# Altium PCB PCB1.PcbDoc
Units mil, origin at the board's own origin, x right, y up, seen from the top; angles counter-clockwise.
Board outline 4250 x 4500 mil, 2 copper layers (Top Layer, Bottom Layer); 39 components, 38 nets, 160 pads, 0 vias.
Unrouted connection lines stored in the file: 41.
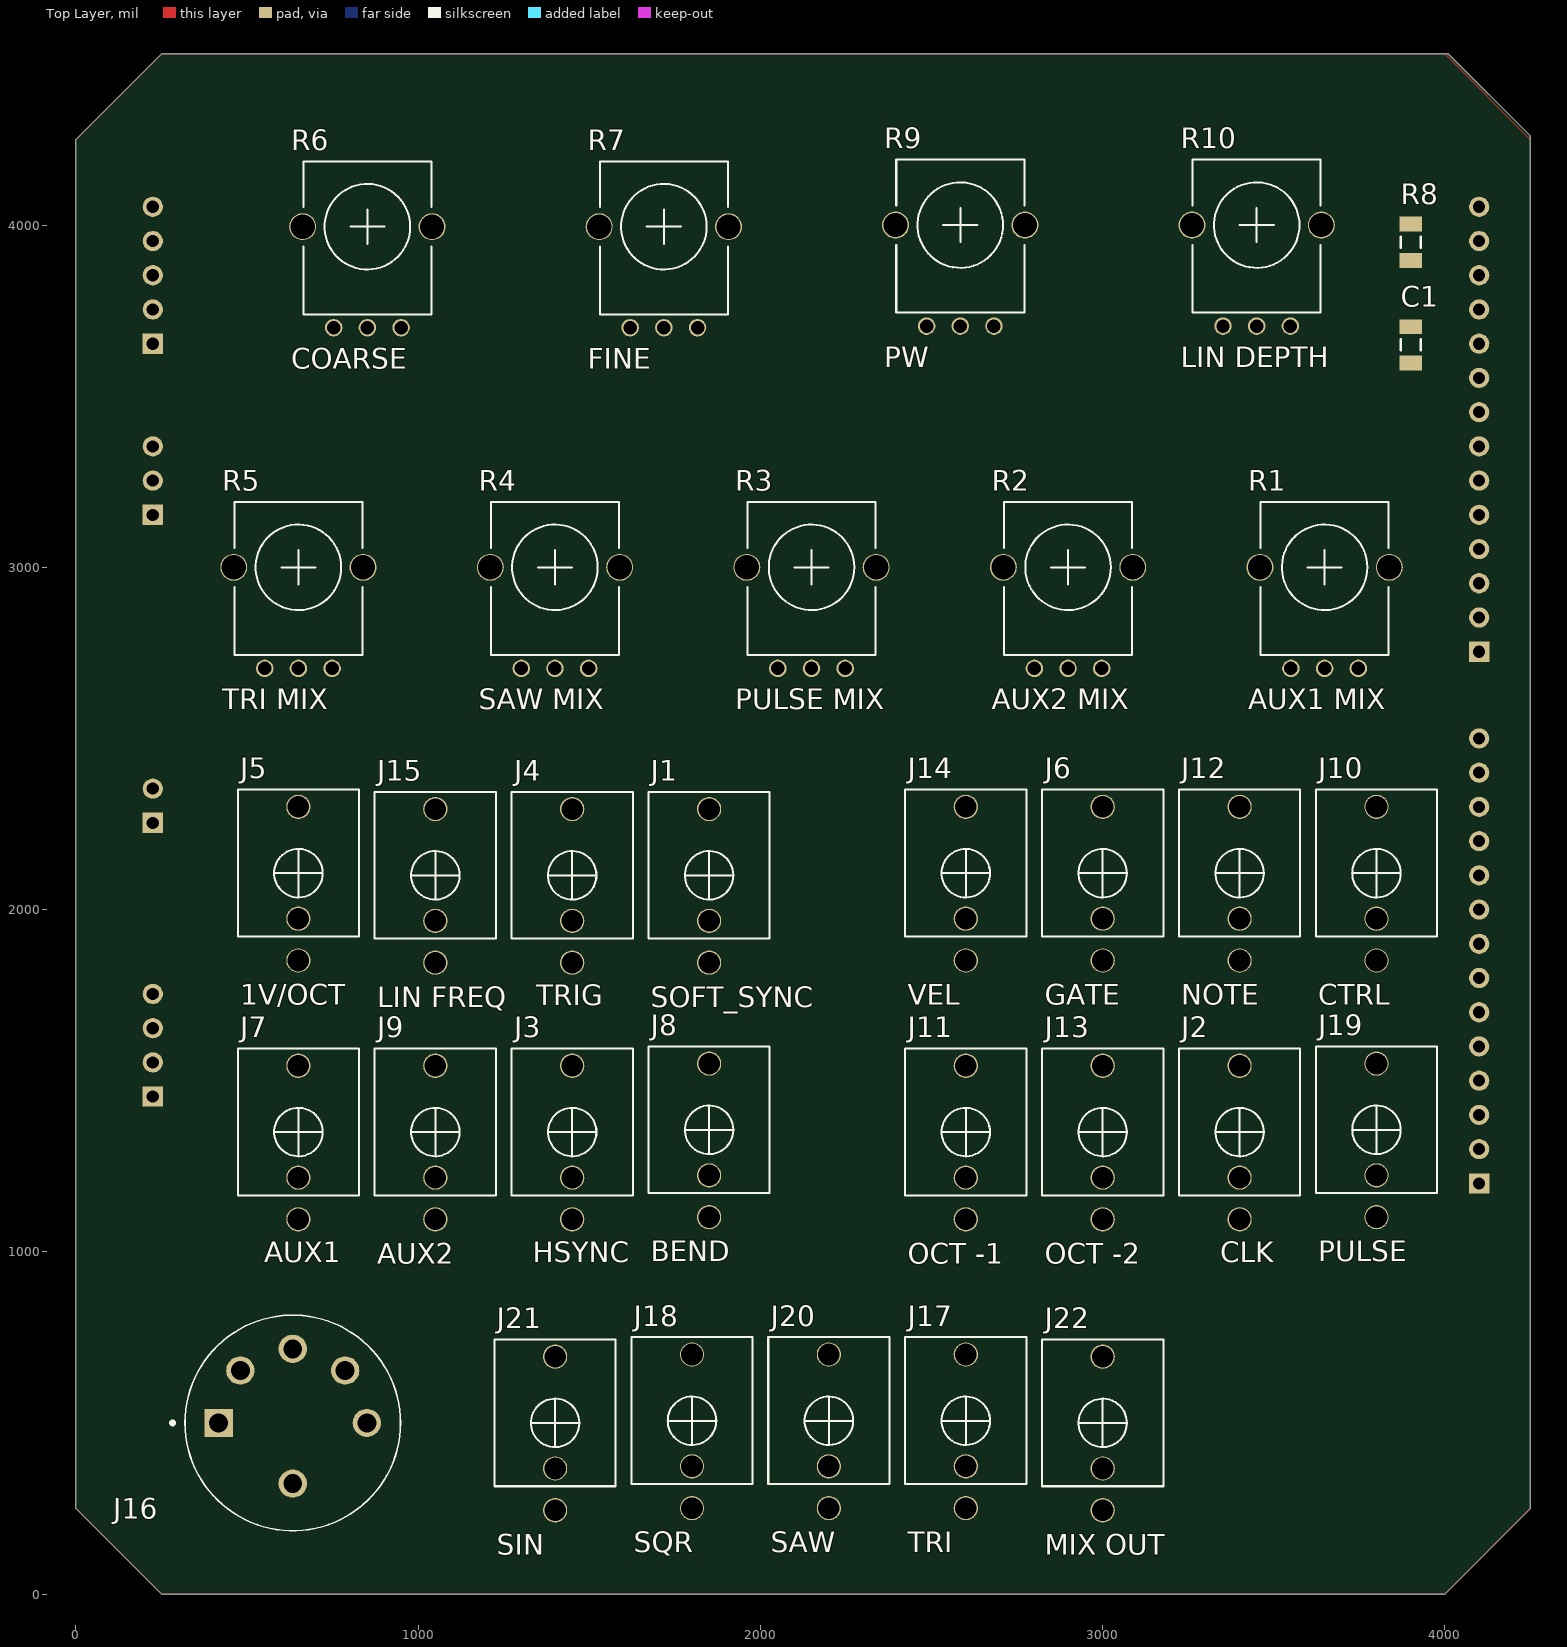
[diagram p0: Top Layer view]
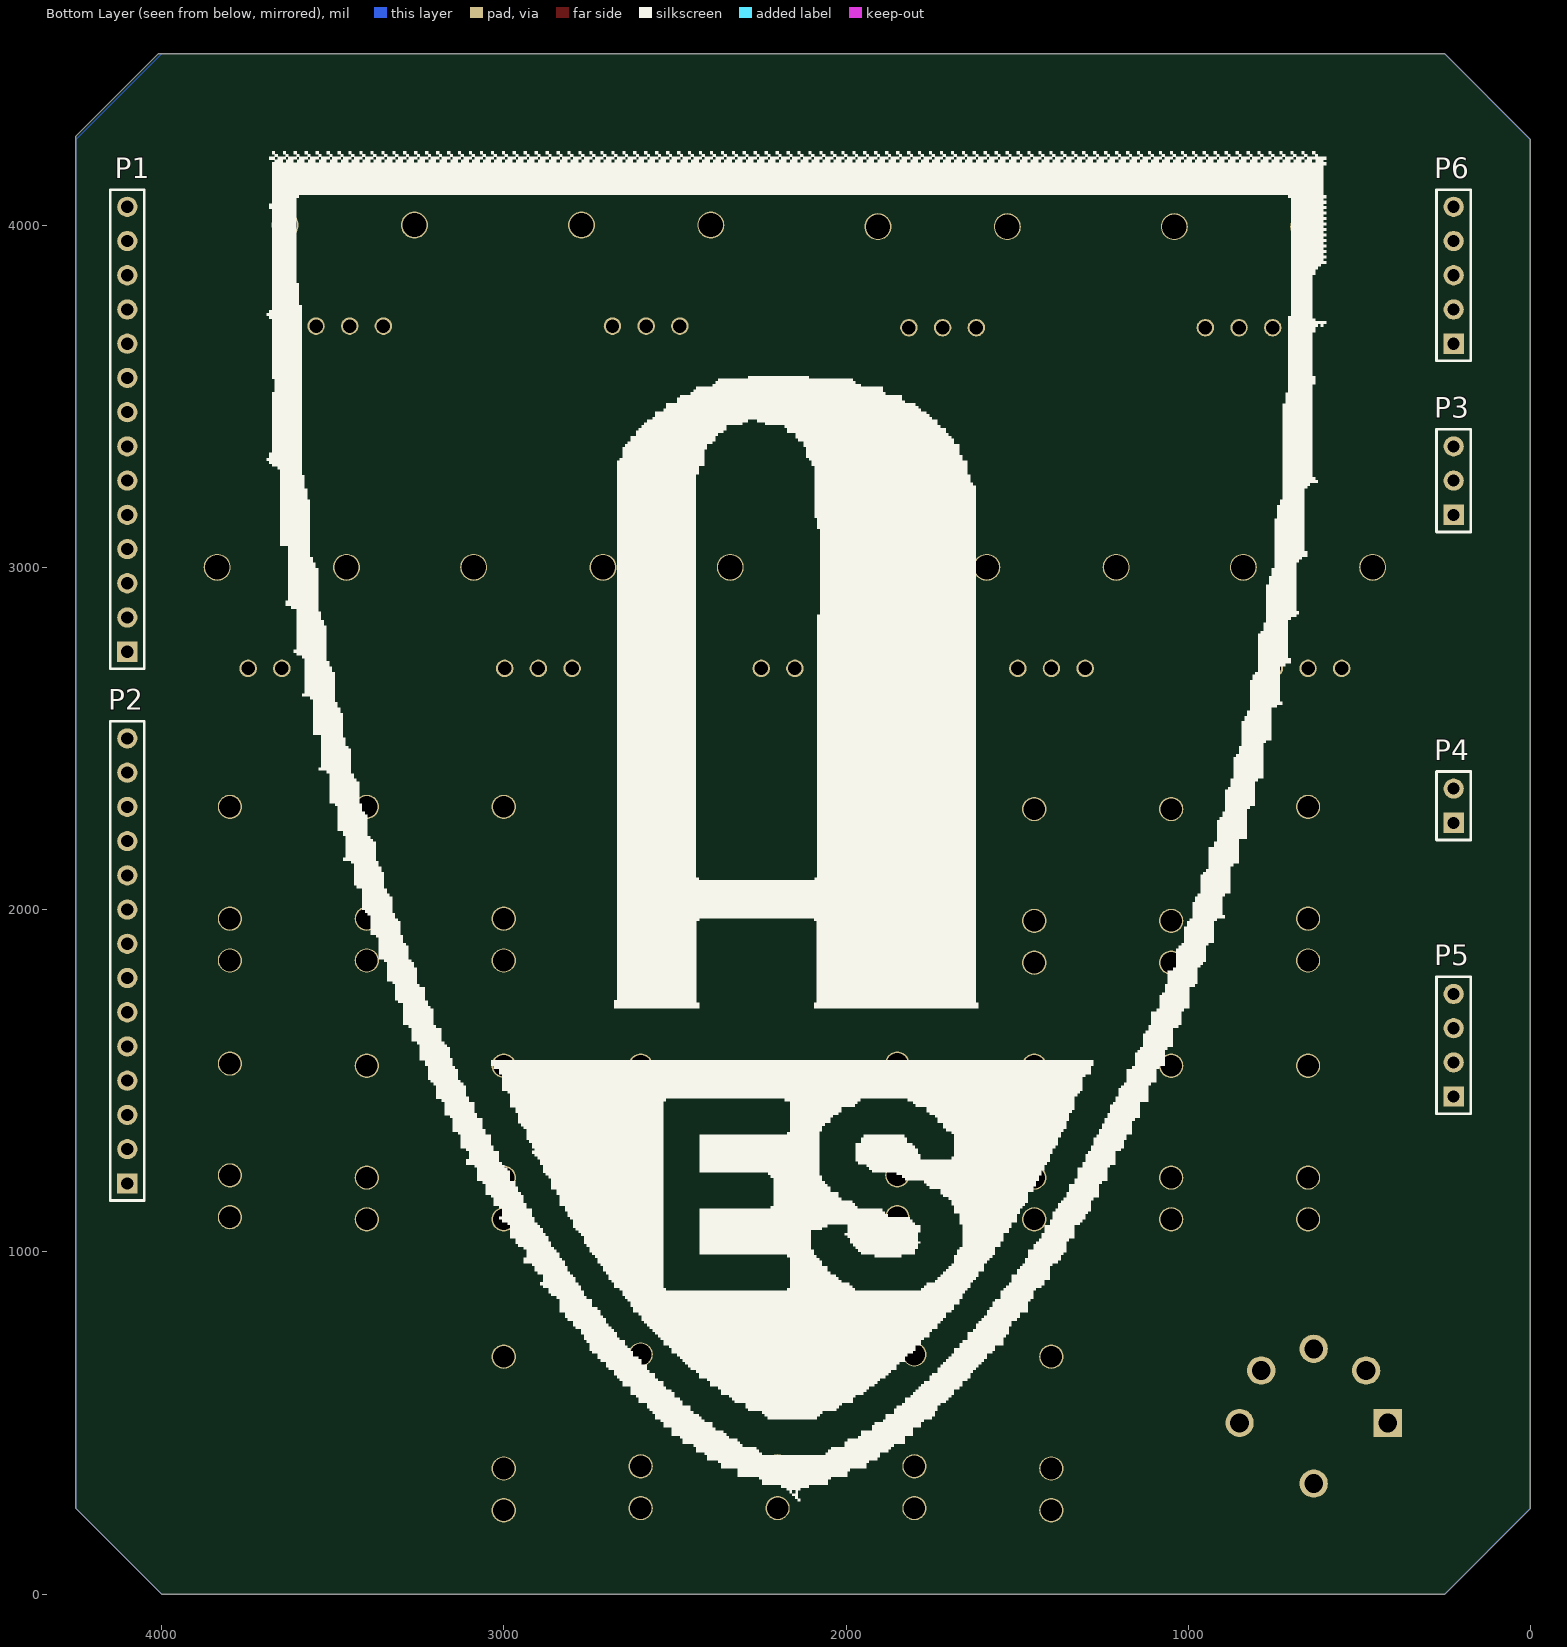
[diagram p1: Bottom Layer view, seen from below]

## Layer stack, top to bottom
Top Solder: solder mask 0.4, Solder Resist, Dk 3.5
Top Layer: signal copper 1.4
Dielectric 1: dielectric 12.6, FR-4, Dk 4.8
Bottom Layer: signal copper 1.4
Bottom Solder: solder mask 0.4, Solder Resist, Dk 3.5

## Board outline
0,250 0,4250 250,4500 4010,4500 4250,4260 4250,250 4000,0 250,0

## Design rules (kind name [scope] priority, off if disabled: settings)
Clearance [All] p1: gap=10 ignorepadtopadclearanceinfootprint=FALSE except(0: Arc-Hole Track-Hole SMDPad-Hole THPad-Hole Via-Hole Fill-Hole Poly-Hole Region-Hole Text-Hole)
PolygonConnect [All] p1: connectstyle=Relief reliefconductorwidth=10 reliefentries=4 polygonreliefangle="90 Angle" airgapwidth=10
RoutingVias [All] p1: holewidth=28 width=50 viastyle="Through Hole" minholewidth=28 minwidth=50 maxholewidth=28 maxwidth=50
SolderMaskExpansion [All] p1: expansion=4 istentingtop=FALSE
Width "Schematic Width Constraint_2" [InNet('VREF_2V5')] p1: maxlimit=15 minlimit=15 preferedwidth=15 minimp=50.000000 maximp=50.000000 favimp=50.000000
Width "Schematic Width Constraint_1" [InNet('GND')] p2: maxlimit=15 minlimit=15 preferedwidth=15 minimp=50.000000 maximp=50.000000 favimp=50.000000
Width "Schematic Width Constraint" [InNet('+5')] p3: maxlimit=15 minlimit=15 preferedwidth=15 minimp=50.000000 maximp=50.000000 favimp=50.000000
Width [All] p4: maxlimit=10 minlimit=10 preferedwidth=10
30 further rules are at their usual default settings.

## Components (designator, comment, footprint, x,y, rotation, side; value= is the part's Value field where it differs from the comment)
C1 "Cap" C1206 3900,3650 r270 top value=1uF
J1 "SOFT_SYNC" PJ301M-12 1850,2100 r0 top value=PJ301M-12
J2 "CLK" PJ301M-12 3400,1350 r0 top value=PJ301M-12
J3 "HSYNC" PJ301M-12 1450,1350 r0 top value=PJ301M-12
J4 "TRIG" PJ301M-12 1450,2100 r0 top value=PJ301M-12
J5 "1V/OCT" PJ301M-12 650,2106.3 r0 top value=PJ301M-12
J6 "GATE" PJ301M-12 3000,2106.3 r0 top value=PJ301M-12
J7 "AUX1" PJ301M-12 650,1350 r0 top value=PJ301M-12
J8 "BEND" PJ301M-12 1850,1356.3 r0 top value=PJ301M-12
J9 "AUX2" PJ301M-12 1050,1350 r0 top value=PJ301M-12
J10 "CTRL" PJ301M-12 3800,2106.3 r0 top value=PJ301M-12
J11 "OCT -1" PJ301M-12 2600,1350 r0 top value=PJ301M-12
J12 "NOTE" PJ301M-12 3400,2106.3 r0 top value=PJ301M-12
J13 "OCT -2" PJ301M-12 3000,1350 r0 top value=PJ301M-12
J14 "VEL" PJ301M-12 2600,2106.3 r0 top value=PJ301M-12
J15 "LIN FREQ" PJ301M-12 1050,2100 r0 top value=PJ301M-12
J16 "MIDI" CUI_SD-50BV 633.46,500 r270 top
J17 "TRI" PJ301M-12 2600,506.3 r0 top value=PJ301M-12
J18 "SQR" PJ301M-12 1800,506.3 r0 top value=PJ301M-12
J19 "PULSE" PJ301M-12 3800,1356.3 r0 top value=PJ301M-12
J20 "SAW" PJ301M-12 2200,506.3 r0 top value=PJ301M-12
J21 "SIN" PJ301M-12 1400,500 r0 top value=PJ301M-12
J22 "MIX OUT" PJ301M-12 3000,500 r0 top value=PJ301M-12
P1 "Header 14" HDR1X14 4100,2753.38 r90 bottom
P2 "Header 14" HDR1X14 4100,1200 r90 bottom
P3 "GTC_OUTL" HDR1X3 224.53,3153.38 r90 bottom
P4 "J3" HDR1X2 224.53,2253.38 r90 bottom
P5 "Header 4" HDR1X4 224.53,1453.38 r90 bottom
P6 "MIDIJACK" HDR1X5 224.53,3653.38 r90 bottom
R1 "AUX1 MIX" Alpha9mmPot 3648.43,3000 r0 top value=1K
R2 "AUX2 MIX" Alpha9mmPot 2898.82,3000 r0 top value=1K
R3 "PULSE MIX" Alpha9mmPot 2149.21,3000 r0 top value=1K
R4 "SAW MIX" Alpha9mmPot 1399.61,3000 r0 top value=1K
R5 "TRI MIX" Alpha9mmPot 650,3000 r0 top value=1K
R6 "COARSE" Alpha9mmPot 851.57,3995.28 r0 top value=10K
R7 "FINE" Alpha9mmPot 1717.72,3995.28 r0 top value=10K
R8 "Res3" C1206 3900,3950 r270 top value=500K
R9 "PW" Alpha9mmPot 2583.86,4000 r0 top value=10K
R10 "LIN DEPTH" Alpha9mmPot 3450,4000 r0 top value=10K

## Footprints (in the part's own frame and the unit in brackets; to place one, negate y for a bottom-side part, rotate by r counter-clockwise, add the part's x,y. Pads: shape width x height; smd on the part's side, far side on the other; paste and mask are expansions set on the pad)
Alpha9mmPot [mm]
  round 1.3 hole 1: 1(-2.5,-7.5) 2(0,-7.5) 3(2.5,-7.5)
  round 2 hole 1.8: Un1(-4.8,0) Un2(4.8,0)
  silkscreen extent -4.75,-6.5 4.75,4.85
C1206 [mm] "Chip Capacitor, Body 3.2x1.6mm, IPC High Density"
  rect 1.1x1.7 smd: 1(-1.35,0) 2(1.35,0)
  silkscreen extent -0.4,-0.75 0.4,0.75, body extent -1.7,-0.9 1.7,0.9, height 1.3
CUI_SD-50BV [mm]
  rect 2.1x2.1 hole 1.4: 1(0,-5.5)
  round 2.1 hole 1.4: 2(-5.5,0) 3(0,5.5) 4(-3.89,-3.89) 5(-3.89,3.89) S(4.5,0)
  silkscreen extent -8,-9.02 8,8
HDR1X2 [mm] "Connector; Header; 2 Position"
  rect 1.5x1.5 hole 0.9: 1(0,0)
  round 1.5 hole 0.9: 2(2.54,0)
  silkscreen extent -1.27,-1.27 3.81,1.27
HDR1X3 [mm] "Connector; Header; 3 Position"
  rect 1.5x1.5 hole 0.9: 1(0,0)
  round 1.5 hole 0.9: 2(2.54,0) 3(5.08,0)
  silkscreen extent -1.27,-1.27 6.35,1.27
HDR1X4 [mm] "Connector; Header; 4 Position"
  rect 1.5x1.5 hole 0.9: 1(0,0)
  round 1.5 hole 0.9: 2(2.54,0) 3(5.08,0) 4(7.62,0)
  silkscreen extent -1.27,-1.27 8.89,1.27
HDR1X5 [mm] "Connector; Header; 5 Position"
  rect 1.5x1.5 hole 0.9: 1(0,0)
  round 1.5 hole 0.9: 2(2.54,0) 3(5.08,0) 4(7.62,0) 5(10.16,0)
  silkscreen extent -1.27,-1.27 11.43,1.27
HDR1X14 [mm] "Connector; Header; 14 Position"
  rect 1.5x1.5 hole 0.9: 1(0,0)
  round 1.5 hole 0.9: 2(2.54,0) 3(5.08,0) 4(7.62,0) 5(10.16,0) 6(12.7,0) 7(15.24,0) 8(17.78,0) 9(20.32,0) 10(22.86,0) 11(25.4,0) 12(27.94,0) 13(30.48,0) 14(33.02,0)
  silkscreen extent -1.27,-1.27 34.29,1.27
PJ301M-12 [mm]
  round 1.8 hole 1.6: 1(0,-6.48) 2(0,-3.38) 3(0,4.92)
  silkscreen extent -4.5,-4.7 4.5,6.2

## Part data
C1: "Capacitor", LatestRevisionDate=17-Jul-2002, LatestRevisionNote="Re-released for DXP Platform.", PackageDescription="Radial Cap, Thru-Hole; 2 Leads; 0.3 in Pin Spacing", PackageReference=RAD-0.3, Published=8-Jun-2000, Publisher="Altium Limited"
J1 J2 J3 J4 J5 J6 J7 J8 J9 J10 J11 J12 J13 J14 J15 J17 J18 J19 J20 J21 J22: library part PJ301M-12
J16: library part SD-50BV, "3~8 Positions, Receptacle, Vertical, Through Hole, Shielded, Standard Circular DIN Connector", Package=None, Supplier Part Number 1=CP-3150-ND, Availability=Unavailable, MF="CUI Devices", MP=SD-50BV, Price=None, SnapEDA_Link=https://www.snapeda.com/parts/SD-50BV/CUI%20Devices/view-part/447142/?ref=snap, Supplier 1=Digi-Key
P1 P2: "Header, 14-Pin", LatestRevisionDate=17-Jul-2002, LatestRevisionNote="Re-released for DXP Platform.", Publisher="Altium Limited"
P3: library part "Header 3", "Header, 3-Pin", LatestRevisionDate=17-Jul-2002, LatestRevisionNote="Re-released for DXP Platform.", Publisher="Altium Limited"
P4: library part "Header 2", "Header, 2-Pin", LatestRevisionDate=17-Jul-2002, LatestRevisionNote="Re-released for DXP Platform.", Publisher="Altium Limited"
P5: "Header, 4-Pin", LatestRevisionDate=17-Jul-2002, LatestRevisionNote="Re-released for DXP Platform.", Publisher="Altium Limited"
P6: library part "Header 5", "Header, 5-Pin", LatestRevisionDate=17-Jul-2002, LatestRevisionNote="Re-released for DXP Platform.", Publisher="Altium Limited"
R1 R2 R3 R4 R5 R6 R7 R9 R10: library part RPot, "Potentiometer", LatestRevisionDate=17-Jul-2002, LatestRevisionNote="Re-released for DXP Platform.", PackageDescription="Variable Resistor, Thru-Hole; 3 Leads", PackageReference=VR5, Published=8-Jun-2000, Publisher="Altium Limited", Set Position=0.5, Sim Note="Enter the Resistance value and the set point into parameter fields."
R8: "Resistor", LatestRevisionDate=29-May-2009, LatestRevisionNote="IPC-7351 Footprint Added.", PackageDescription="Chip Resistor", PackageReference=J1-0603, Published=8-Jun-2000, Publisher="Altium Limited"

## Nets (pads, with @x,y where several pads share a name; then routed paths per layer and width w, separated by ;. In a path a pad name is that pad's centre, name@x,y a point inside that pad or via, vN(x,y) a via of type N, cw(c..) or ccw(c..) an arc to the next point about the centre after c; other vN are vias at no path point)
1V_OCT: J5.3 P1.3
+5: P2.10 R1.1 R2.1 R3.1 R4.1 R5.1 R6.1 R7.1
AUX1_IN: J7.3 P1.6
AUX1_MIX_CV: P1.8 R1.3
AUX2_IN: J9.3 P1.7
AUX2_MIX_CV: P1.9 R2.3
CLOCK: J2.3 P3.1
COARSE_TUNE: P1.5 R6.3
CONTROL: J10.3 P5.2
CURRENT_SINK: J16.5 P6.5
CURRENT_SOURCE: J16.4 P6.4
CV_PWM: P2.7 R9.3
FINE_TUNE: P1.4 R7.3
GATE: J6.3 P3.3
GND: J1.1 J2.1 J3.1 J3.2 J4.1 J5.1 J6.1 J7.1 J8.1 J9.1 J10.1 J11.1 J12.1 J13.1 J14.1 J15.1 J17.1 J18.1 J19.1 J20.1 J21.1 J22.1 P1.14 P2.13 P2.14 P4.2 R1.2 R2.2 R3.2 R4.2 R5.2 R9.2 R10.2
HARD_SYNC: J3.3 P1.2
LIN_FREQ: P1.13 R8.1
LIN_FREQ_INPUT: J15.3 R10.1
MIX: J22.3 P2.6
NetC1_1: C1.1 R8.2
NOTE: J12.3 P5.3
OCT_-1: J11.3 P2.8
OCT_-2: J13.3 P2.9
PITCH_BEND: J8.3 P5.1
PULSE_MIX_CV: P1.10 R3.3
PULSE_OUT_BUFF: J19.3 P2.3
SAW_MIX_CV: P1.11 R4.3
SAW_OUT_BUFF: J20.3 P2.4
SHIELD: J16.2 J16.S P6.2
SIN_OUT_BUFF: J21.3 P2.5
SOFT_SYNC: J1.3 P1.1
SQR_OUT_BUFF: J18.3 P2.2
TRI_MIX_CV: P1.12 R5.3
TRI_OUT_BUFF: J17.3 P2.1
TRIGGER: J4.3 P3.2
VELOCITY: J14.3 P5.4
VIB_DEPTH: C1.2 R10.3
VREF_2V5: P2.11 R9.1
pads on no net: J1.2 J2.2 J4.2 J5.2 J6.2 J7.2 J8.2 J9.2 J10.2 J11.2 J12.2 J13.2 J14.2 J15.2 J16.1 J16.3 J17.2 J18.2 J19.2 J20.2 J21.2 J22.2 P2.12 P4.1 P6.1 P6.3 R1.Un1 R1.Un2 R2.Un1 R2.Un2 R3.Un1 R3.Un2 R4.Un1 R4.Un2 R5.Un1 R5.Un2 R6.2 R6.Un1 R6.Un2 R7.2 R7.Un1 R7.Un2 R9.Un1 R9.Un2 R10.Un1 R10.Un2

## Polygon pours and split planes (outlines as drawn)
+5 on Top Layer "NONET_L01_P000" (solid, shelved, pour order 0): 250,0 0,250 0,4250 250,4500 4000,4500 4250,4250 4250,250 4000,0
GND on Bottom Layer "GND_L01_P000" (solid, shelved, pour order 1): 250,0 0,250 0,4250 250,4500 4000,4500 4250,4250 4250,250 4000,0

## Silkscreen, mask and mechanical layers (free items; w line width, h text height)
Bottom Overlay:
  drawing of 3 lines, arcs and shapes, not listed
Mechanical 1:
  the board outline again, w10